# Altium PCB AdcetAlSys.PcbDoc
Units mm, origin at the board's own origin, x right, y up, seen from the top; angles counter-clockwise.
Board outline 104.5 x 67 mm, 2 copper layers (Top Layer, Bottom Layer); 36 components, 38 nets, 160 pads, 15 vias.
Unrouted connection lines stored in the file: 4.
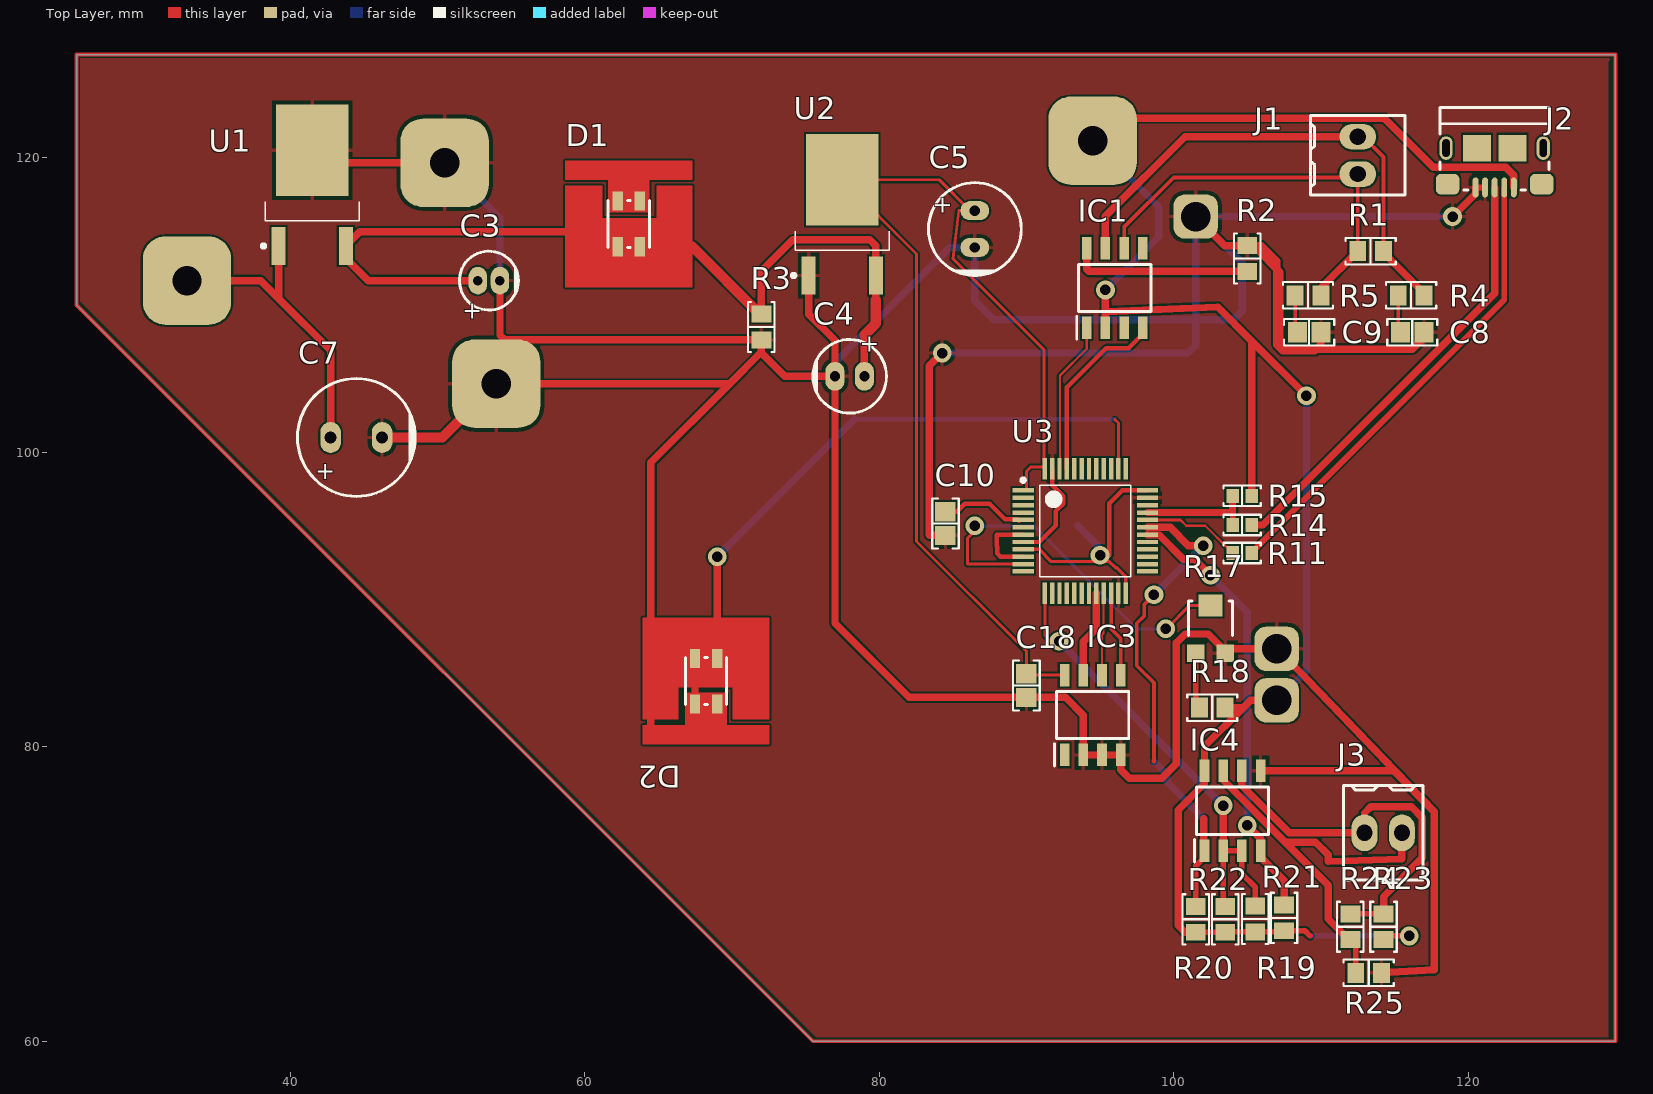
[diagram p0: Top Layer view]
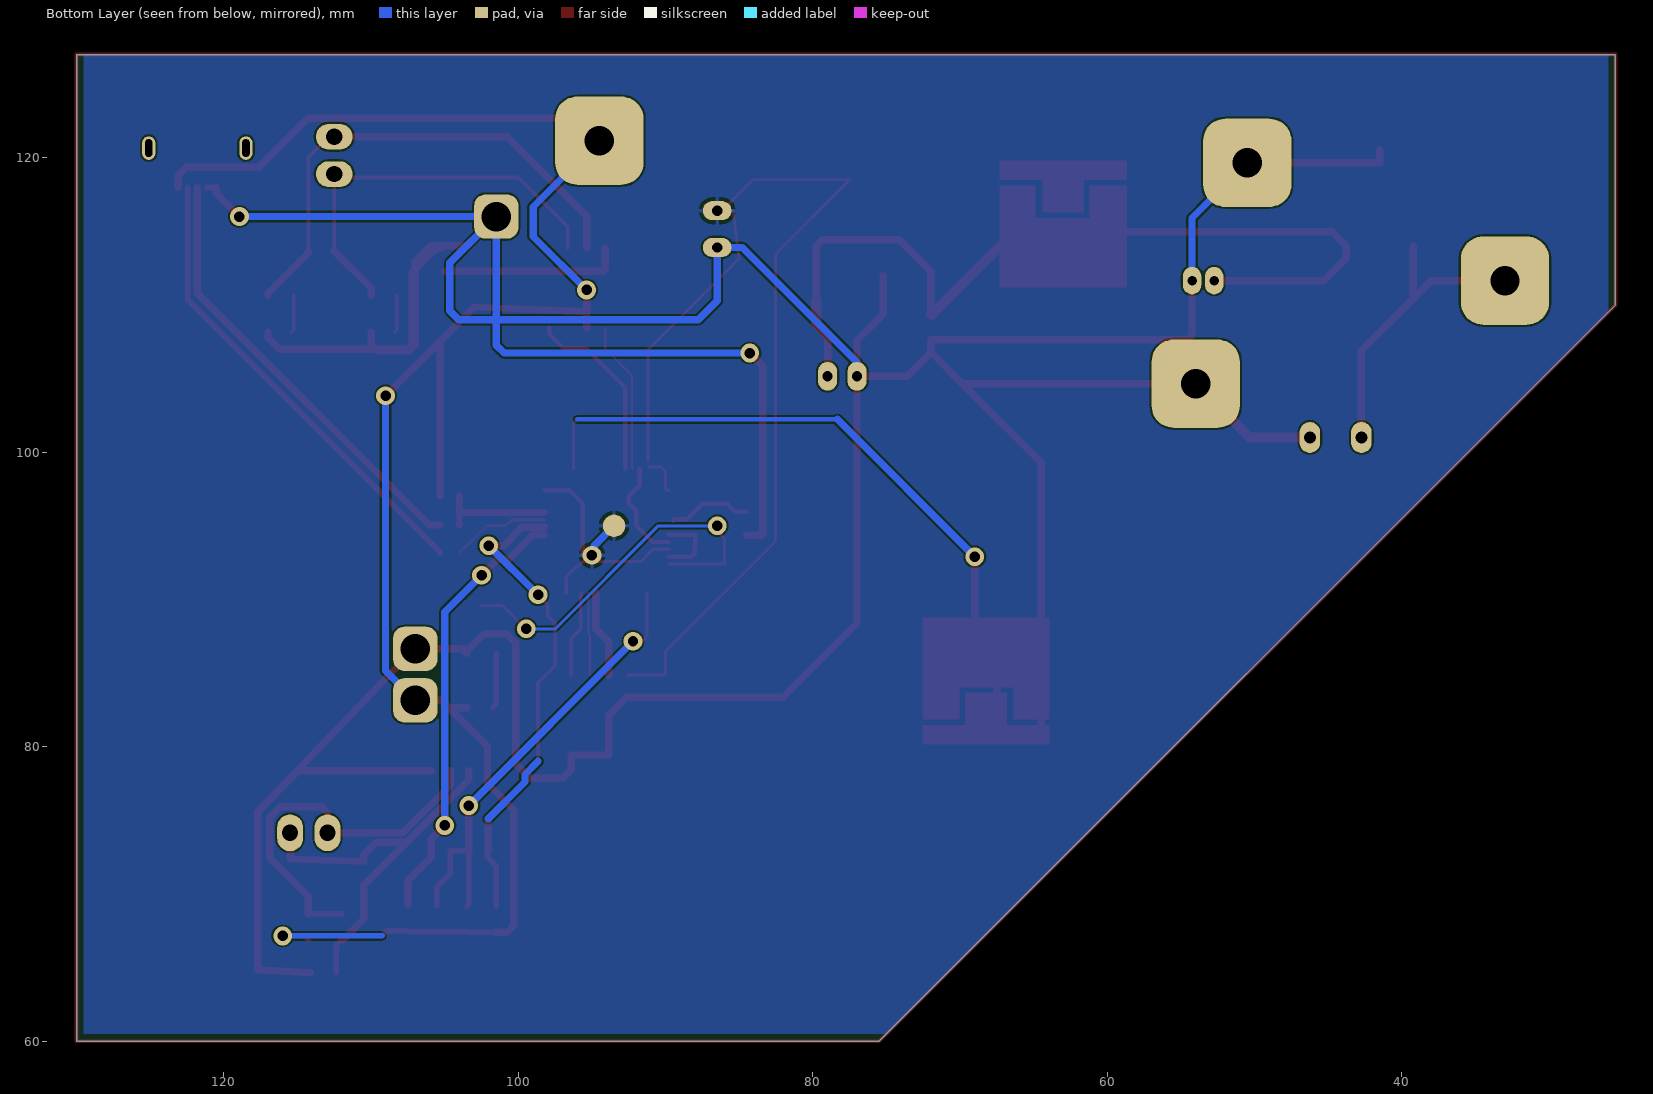
[diagram p1: Bottom Layer view, seen from below]
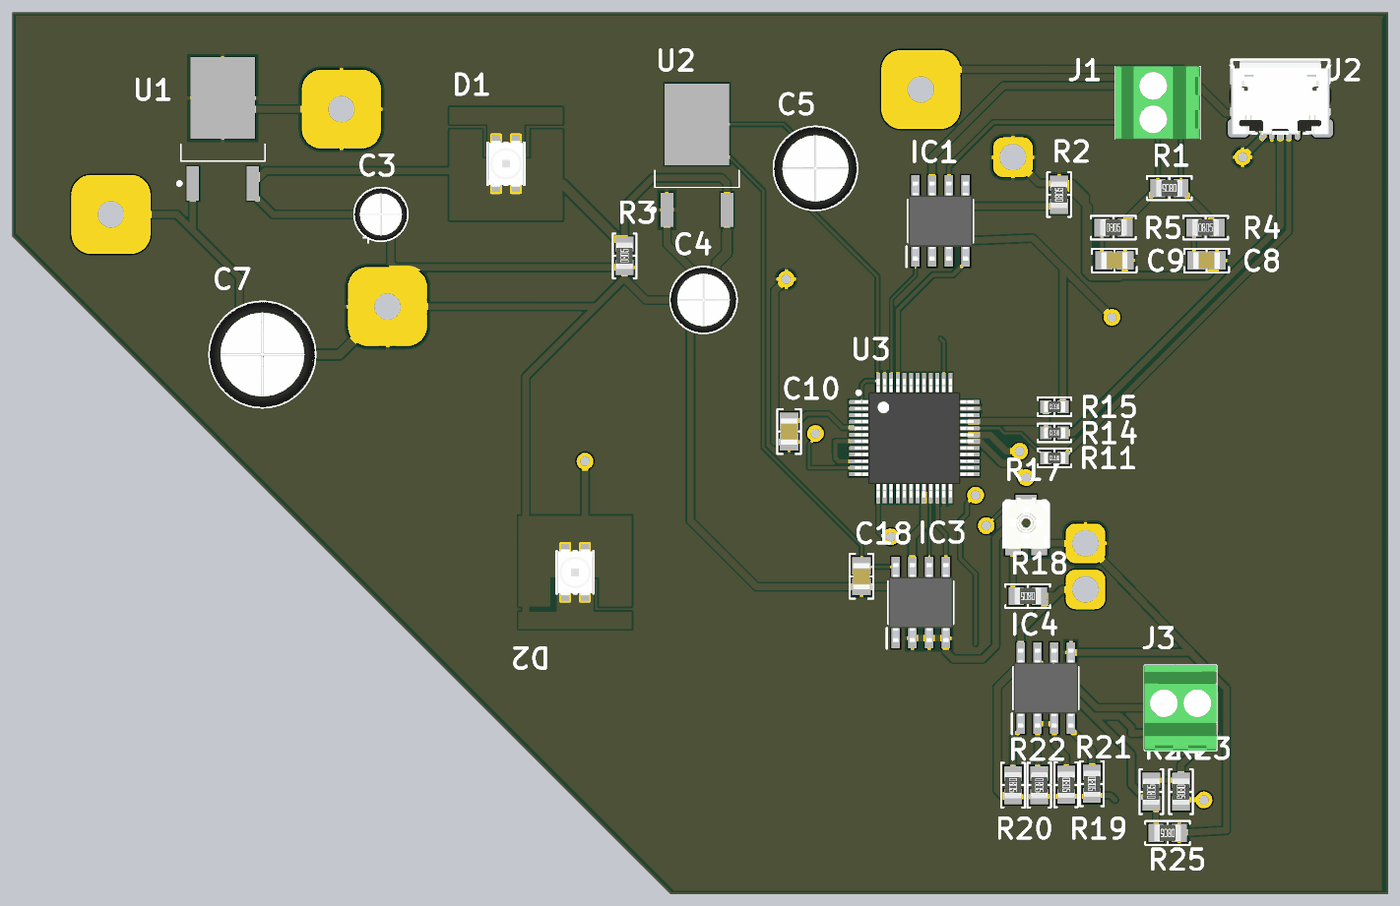
[diagram p2: 3D render of the assembled board from above, using the file's embedded part models]

## Layer stack, top to bottom
Top Solder: solder mask 0.0102, Solder Resist, Dk 3.5
Top Layer: signal copper 0.0356
Dielectric 1: dielectric 0.32, FR-4, Dk 4.8
Bottom Layer: signal copper 0.0356
Bottom Solder: solder mask 0.0102, Solder Resist, Dk 3.5

## Board outline
25.5,110 25.5,127 130,127 130,60 75.5,60

## Design rules (kind name [scope] priority, off if disabled: settings)
Clearance Clearance_1 [All] p1: gap=0.125 ignorepadtopadclearanceinfootprint=FALSE except(0: Arc-Hole Track-Hole SMDPad-Hole THPad-Hole Via-Hole Fill-Hole Poly-Hole Region-Hole Text-Hole)
Clearance [All] p2: gap=0.152 ignorepadtopadclearanceinfootprint=FALSE
HoleSize [All] p1: absolutevalues=TRUE maxlimit=5 minlimit=0.025 maxpercent=80.000 minpercent=20.000
PolygonConnect [All] p1: connectstyle=Relief reliefconductorwidth=0.254 reliefentries=4 polygonreliefangle="90 Angle" airgapwidth=0.254
RoutingVias [All] p1: holewidth=0.711 width=1.27 viastyle="Through Hole" minholewidth=0.711 minwidth=1.27 maxholewidth=0.711 maxwidth=1.27
SolderMaskExpansion [All] p1: expansion=0.102
Width [All] p1: maxlimit=2 minlimit=0.152 preferedwidth=0.5
29 further rules are at their usual default settings.

## Components (designator, comment, footprint, x,y, rotation, side; value= is the part's Value field where it differs from the comment)
C3 "1µF" "CAP TH ALUM ELEC D4.00mm S1.50mm H8.00mm" 53.5,111.65 r180 top
C4 "10µF" "CAP TH ALUM ELEC D5.00mm S2.00mm H11.00mm" 78,105.15 r0 top
C5 "100µF" "CAP TH ALUM ELEC D6.30mm S2.50mm H11.20mm" 86.5,115.15 r90 top
C7 "220µF" "CAP TH ALUM ELEC D8.00mm S3.50mm H12.50mm" 44.5,101 r180 top
C8 "560pF" "CAP 0805_2012" 116.2,108.15 r180 top
C9 "560pF" "CAP 0805_2012" 109.2,108.15 r180 top
C10 "0.1µF" "CAP 0805_2012" 84.5,95.15 r90 top
C18 "0.1µF" "CAP 0805_2012" 90,84.15 r270 top
D1 "ASMT-QRBD-AEF0E" "Broadcom 4-PLLC 3228" 63,115.5 r0 top
D2 "ASMT-QRBD-AEF0E" "Broadcom 4-PLLC 3228" 68.25,84.45 r180 top
IC1 "MCP2551T-E_SN" SOIC127P600X175-8N 96,111.15 r90 top
IC3 "M24M01-RMN6P" SOIC127P600X175-8N 94.5,82.15 r90 top
IC4 "MAX485ESA+T" SOIC127P600X175-8N 104,75.65 r90 top
J1 "282834-2" "TE 282834-2" 112.5,120.15 r90 top
J2 "10118193-0001LF" "FCI USB 10118193-0001LF" 121.8,120.6 r0 top
J3 "282834-2" "TE 282834-2" 114.23,74.15 r0 top
R1 "120 Ohms" "RES 0805_2012" 113.375,113.65 r180 top
R2 "4.7 kOhms" "RES 0805_2012" 105,113.15 r90 top
R3 "220 Ohms" "RES 0805_2012" 72,108.5 r90 top
R4 "100 Ohms" "RES 0805_2012" 116.125,110.65 r0 top
R5 "100 Ohms" "RES 0805_2012" 109.125,110.65 r0 top
R11 "20 Ohms" "RES 0603_1608" 104.65,93.15 r180 top
R14 "20 Ohms" "RES 0603_1608" 104.65,95.054 r180 top
R15 "4.7 kOhms" "RES 0603_1608" 104.65,97.039 r180 top
R17 "10 kOhms" "POT BOURNS TRIMPOT TC33" 102.5,88.15 r0 top
R18 "5 kOhms" "RES 0805_2012" 102.625,82.65 r180 top
R19 "10 kOhms" "RES 0805_2012" 103.5,68.275 r270 top
R20 "10 kOhms" "RES 0805_2012" 101.5,68.275 r270 top
R21 "10 kOhms" "RES 0805_2012" 107.5,68.375 r270 top
R22 "10 kOhms" "RES 0805_2012" 105.54,68.302 r270 top
R23 "20 kOhms" "RES 0805_2012" 114.256,67.775 r270 top
R24 "120 Ohms" "RES 0805_2012" 112,67.775 r90 top
R25 "20 kOhms" "RES 0805_2012" 113.243,64.641 r180 top
U1 "L7805-DPAK" DPAK228P972X230-3N 41.5,118.15 r90 top
U2 "LD108633 DPAK" DPAK228P972X230-3N 77.5,116.15 r90 top
U3 "STM32F101" LQFP48-STM 94,94.65 r0 top

## Footprints (in the part's own frame and the unit in brackets; to place one, negate y for a bottom-side part, rotate by r counter-clockwise, add the part's x,y. Pads: shape width x height; smd on the part's side, far side on the other; paste and mask are expansions set on the pad)
"Broadcom 4-PLLC 3228" [mm] "SOJ, 6-Leads, Body 3.20x2.80mm, IPC Medium Density"
  rect 0.7x1.3 smd paste-0.05 mask+0.1: 1(-0.75,-1.55) 1(0.75,-1.55) 2(-0.75,1.55) 2(0.75,1.55)
  Top Layer region: -1.4,0.8 1.4,0.8 1.4,3 4.3,3 4.3,4.3 -4.3,4.3 -4.3,3 -1.4,3
  Top Layer region: -4.3,2.6 -1.8,2.6 -1.8,0.4 1.9,0.4 1.9,2.6 4.3,2.6 4.3,-4.3 -4.3,-4.3
  silkscreen extent -1.4,-1.6 1.4,1.6, body extent -1.4,-1.8 1.4,1.8, height 2.1
"CAP 0805_2012" [mm] "Chip Capacitor, 2-Leads, Body 2.00x1.20mm, IPC Medium Density"
  rect 1.3x1.4 smd: 1(-0.8,0) 2(0.8,0)
  silkscreen extent -1.7,-0.9 1.7,0.9, body extent -1,-0.64 1,0.64, height 1.26
"CAP TH ALUM ELEC D4.00mm S1.50mm H8.00mm" [mm] "4mm Diameter 1.5mm Lead Spacing Aluminum Electrolytic Capacitors Radial, Can"
  oval 1.25x1.875 hole 0.65: 1(0.75,0) 2(-0.75,0)
  silkscreen extent -2,-2 2,2, body extent -2.01,-2 2,2, height 8
"CAP TH ALUM ELEC D5.00mm S2.00mm H11.00mm" [mm] "5mm Diameter 2mm Lead Spacing Aluminum Electrolytic Capacitors Radial, Can"
  oval 1.3x1.95 hole 0.7: 1(1,0) 2(-1,0)
  silkscreen extent -2.5,-2.5 2.5,2.5, body extent -2.51,-2.5 2.5,2.5, height 11
"CAP TH ALUM ELEC D6.30mm S2.50mm H11.20mm" [mm] "6.3mm Diameter 2.5mm Lead Spacing Aluminum Electrolytic Capacitors Radial, Can"
  oval 1.3x1.95 hole 0.7: 1(1.25,0) 2(-1.25,0)
  silkscreen extent -3.15,-3.15 3.15,3.15, body extent -3.16,-3.15 3.15,3.15, height 11.2
"CAP TH ALUM ELEC D8.00mm S3.50mm H12.50mm" [mm] "8mm Diameter 3.5mm Lead Spacing Aluminum Electrolytic Capacitors Radial, Can"
  oval 1.4x2.1 hole 0.8: 1(1.75,0) 2(-1.75,0)
  silkscreen extent -4,-4 4,4, body extent -4.01,-4 4,4, height 12.5
DPAK228P972X230-3N [mm] "D-PAK, 3-Pads, Body 6,40x6,56mm (max), IPC Medium Density"
  rect 2.6x0.95 smd mask+0.05: 1(-4.15,2.28) 2(-4.15,-2.28)
  rect 6.2x4.9 smd mask+0.05: 3(2.35,0)
  silkscreen extent -4.27,-3.2 -1.15,3.43, body extent -2.5,-3.2 4.1,3.2, height 2.3
"FCI USB 10118193-0001LF" [mm] "USB 2.0 Type B Micro"
  oval 0.4x1.35 smd: 1(1.3,-2.625) 2(0.65,-2.625) 3(0,-2.625) 4(-0.65,-2.625) 5(-1.3,-2.625)
  oval 0.9x1.6 hole 0.5 slot 1.2 at 90 deg: S(-3.3,0.05) S(3.3,0.05)
  rrect50% 1.6x1.4 smd: S(-3.2,-2.4) S(3.2,-2.4)
  rect 1.9x1.8 smd: S(-1.2,0.05) S(1.2,0.05)
  silkscreen extent -3.7,-2.8 3.7,2.8, body extent -3.93,-2.9 3.93,2.76, height 2.78
LQFP48-STM [mm] "TSQFP, 48-Leads, Body 7,00x7,00mm, Pitch 0,50mm, IPC Medium Density"
  rect 1.45x0.3 smd mask+0.05: 1(-4.225,2.75) 2(-4.225,2.25) 3(-4.225,1.75) 4(-4.225,1.25) 5(-4.225,0.75) 6(-4.225,0.25) 7(-4.225,-0.25) 8(-4.225,-0.75) 9(-4.225,-1.25) 10(-4.225,-1.75) 11(-4.225,-2.25) 12(-4.225,-2.75) 25(4.225,-2.75) 26(4.225,-2.25) 27(4.225,-1.75) 28(4.225,-1.25) 29(4.225,-0.75) 30(4.225,-0.25) 31(4.225,0.25) 32(4.225,0.75) 33(4.225,1.25) 34(4.225,1.75) 35(4.225,2.25) 36(4.225,2.75)
  rect 0.3x1.45 smd mask+0.05: 13(-2.75,-4.225) 14(-2.25,-4.225) 15(-1.75,-4.225) 16(-1.25,-4.225) 17(-0.75,-4.225) 18(-0.25,-4.225) 19(0.25,-4.225) 20(0.75,-4.225) 21(1.25,-4.225) 22(1.75,-4.225) 23(2.25,-4.225) 24(2.75,-4.225) 37(2.75,4.225) 38(2.25,4.225) 39(1.75,4.225) 40(1.25,4.225) 41(0.75,4.225) 42(0.25,4.225) 43(-0.25,4.225) 44(-0.75,4.225) 45(-1.25,4.225) 46(-1.75,4.225) 47(-2.25,4.225) 48(-2.75,4.225)
  silkscreen extent -4.35,-3.1 3.1,3.57, body extent -4.5,-4.5 4.5,4.5, height 1.6
"POT BOURNS TRIMPOT TC33" [mm] "Bourns Trimpot TC33X-1 - Open Frame 3mm x 3.8mm x 1.2mm"
  rect 1.2x1.2 smd: 1(-1,-1.8) 3(1,-1.8)
  rect 1.6x1.5 smd: 2(0,1.45)
  silkscreen extent -1.5,-0.6 1.5,1.75, body extent -1.8,-1.91 1.8,1.95, height 1.15
"RES 0603_1608" [mm] "Chip Resistor, 2-Leads, Body 1.60x0.80mm, IPC Medium Density"
  rect 0.85x0.95 smd: 1(-0.65,0) 2(0.65,0)
  silkscreen extent -1.27,-0.7 1.27,0.7, body extent -0.8,-0.4 0.8,0.4, height 0.45
"RES 0805_2012" [mm] "Chip Resistor, 2-Leads, Body 2.00x1.25mm, IPC Medium Density"
  rect 1.15x1.35 smd: 1(-0.875,0) 2(0.875,0)
  silkscreen extent -1.7,-0.9 1.7,0.9, body extent -1,-0.62 1,0.63, height 0.6
SOIC127P600X175-8N [mm]
  rect 1.525x0.65 smd: 1(-2.712,1.905) 2(-2.712,0.635) 3(-2.712,-0.635) 4(-2.712,-1.905) 5(2.712,-1.905) 6(2.712,-0.635) 7(2.712,0.635) 8(2.712,1.905)
  silkscreen extent -3.48,-2.45 1.6,2.58, body extent -3,-2.45 3,2.45, height 1.75
"TE 282834-2" [mm]
  oval 1.75x2.5 hole 1.1: 1(-1.27,0) 2(1.27,0)
  silkscreen extent -2.7,-3.2 2.7,3.2, body extent -2.77,-3.25 2.77,3.25, height 10

## Part data
C3: library part USR1H010MDD, "CAP ALUM 1UF 20% 50V RADIAL", Device Package="Radial, Can", Lifetime @ Temp.="2000 Hrs @ 85°C", Manufacturer=Nichicon, Operating Temperature="-40°C ~ 85°C", Ripple Current @ High Frequency="15mA @ 10kHz", Ripple Current @ Low Frequency="10mA @ 120Hz", Supplier Part Number 1=493-6031-ND, Tolerance=±20%, Voltage - Rated=50V, Applications="General Purpose", Capacitance=1µF, ComponentLink1Description=Datasheet, ComponentLink1URL=http://nichicon-us.com/english/products/pdfs/e-usa_usr.pdf, ComponentLink2Description="DigiKey Link", ComponentLink2URL=http://digikey.com/product-detail/en/nichicon/USR1H010MDD/493-6031-ND/2539217, Height - Seated (Max)="0.315\" (8.00mm)", LastUpdated="6.09.2020 01:48:38", Lead Spacing="0.059\" (1.50mm)", Lifecycle Status=Active, Minimum Order=1, Mounting Type="Through Hole", Package / Case="Radial, Can", Packaging=Bulk, Part Number=USR1H010MDD, Part Status=Active, PartId=23369, Polarization=Polar, Price=0.23, Series=USR, Size / Dimension="0.157\" Dia (4.00mm)", Supplier 1=DigiKey
C4: library part RFS-16V100ME3#5, "CAP ALUM 10UF 20% 16V RADIAL", Device Package="Radial, Can", Lifetime @ Temp.="1000 Hrs @ 85°C", Manufacturer="Elna America", Operating Temperature="-40°C ~ 85°C", Ripple Current @ Low Frequency="35mA @ 120Hz", Supplier Part Number 1=604-1109-ND, Tolerance=±20%, Voltage - Rated=16V, Applications=Audio, Capacitance=10µF, ComponentLink1Description=Datasheet, ComponentLink1URL=http://www.elna.co.jp/en/capacitor/alumi/catalog/pdf/rfs_e.pdf, ComponentLink2Description="DigiKey Link", ComponentLink2URL=http://digikey.com/product-detail/en/elna-america/RFS-16V100ME3-5/604-1109-ND/2171160, Height - Seated (Max)="0.433\" (11.00mm)", LastUpdated="4.09.2020 23:28:56", Lead Spacing="0.079\" (2.00mm)", Lifecycle Status=Active, Minimum Order=1, Mounting Type="Through Hole", Package / Case="Radial, Can", Packaging=Bulk, Part Number=RFS-16V100ME3#5, Part Status=Active, PartId=21468, Polarization=Polar, Price=0.30, Series="RFS, SILMIC II", Size / Dimension="0.197\" Dia (5.00mm)", Supplier 1=DigiKey
C5: library part ECE-A0JN101U, "CAP ALUM 100UF 20% 6.3V RADIAL", Device Package="Radial, Can", Lifetime @ Temp.="2000 Hrs @ 85°C", Manufacturer="Panasonic Electronic Components", Operating Temperature="-40°C ~ 85°C", Ripple Current @ High Frequency="221mA @ 10kHz", Supplier Part Number 1=P1143-ND, Tolerance=±20%, Voltage - Rated=6.3V, Applications="General Purpose", Capacitance=100µF, ComponentLink2Description="DigiKey Link", ComponentLink2URL=http://digikey.com/product-detail/en/panasonic-electronic-components/ECE-A0JN101U/P1143-ND/227584, Height - Seated (Max)="0.441\" (11.20mm)", LastUpdated="4.09.2020 01:05:43", Lead Spacing="0.098\" (2.50mm)", Lifecycle Status=Active, Minimum Order=1, Mounting Type="Through Hole", Package / Case="Radial, Can", Packaging=Bulk, Part Number=ECE-A0JN101U, Part Status=Active, PartId=19981, Polarization=Bi-Polar, Price=0.45, Series=SU, Size / Dimension="0.248\" Dia (6.30mm)", Supplier 1=DigiKey
C7: library part ECA-1VM221BJ, "CAP ALUM 220UF 20% 35V RADIAL", Device Package="Radial, Can", Lifetime @ Temp.="2000 Hrs @ 85°C", Manufacturer="Panasonic Electronic Components", Operating Temperature="-40°C ~ 85°C", Ripple Current @ High Frequency="595mA @ 10kHz", Ripple Current @ Low Frequency="350mA @ 120Hz", Supplier Part Number 1=P10419TB-ND, Tolerance=±20%, Voltage - Rated=35V, Applications="General Purpose", Capacitance=220µF, ComponentLink1Description=Datasheet, ComponentLink1URL=//media.digikey.com/pdf/Data%20Sheets/Panasonic%20Electronic%20Components/ECA-xxM%20Series,TypeA.pdf, ComponentLink2Description="DigiKey Link", ComponentLink2URL=http://digikey.com/product-detail/en/panasonic-electronic-components/ECA-1VM221BJ/P10419TB-ND/268504, Height - Seated (Max)="0.492\" (12.50mm)", LastUpdated="7.09.2020 05:24:51", Lead Spacing="0.138\" (3.50mm)", Lifecycle Status=Active, Minimum Order=1000, Mounting Type="Through Hole", Package / Case="Radial, Can", Packaging=TapeAndBox, Part Number=ECA-1VM221BJ, Part Status=Active, PartId=7241, Polarization=Polar, Price=0.08, Series=M, Size / Dimension="0.315\" Dia (8.00mm)", Supplier 1=DigiKey
C8 C9: library part 08055A561FAT2A, "CAP CER 560PF 50V C0G/NP0 0805", Device Package="0805 (2012 Metric)", Manufacturer="AVX Corporation", Operating Temperature="-55°C ~ 125°C", Supplier Part Number 1=478-6047-1-ND, Temperature Coefficient="C0G, NP0", Tolerance=±1%, Voltage - Rated=50V, Applications="General Purpose", Capacitance=560pF, ComponentLink1Description=Datasheet, ComponentLink1URL=http://datasheets.avx.com/C0GNP0-Dielectric.pdf, ComponentLink2Description="DigiKey Link", ComponentLink2URL=http://digikey.com/product-detail/en/avx-corporation/08055A561FAT2A/478-6047-1-ND/2208961, LastUpdated="2.09.2020 01:04:40", Lifecycle Status=Active, Minimum Order=1, Mounting Type="Surface Mount, MLCC", Package / Case="0805 (2012 Metric)", Packaging=TapeAndReel, Part Number=08055A561FAT2A, Part Status=Active, PartId=3349, Price=0.15, Series=-, Size / Dimension="0.079\" L x 0.049\" W (2.01mm x 1.25mm)", Supplier 1=DigiKey, Thickness (Max)="0.037\" (0.94mm)"
C10 C18: library part 0805Y0250104KXT, "CAP CER 0.1UF 25V X7R 0805", Device Package="0805 (2012 Metric)", Manufacturer="Knowles Syfer", Operating Temperature="-55°C ~ 125°C", Supplier Part Number 1=1608-1010-1-ND, Temperature Coefficient=X7R, Tolerance=±10%, Voltage - Rated=25V, Applications="Boardflex Sensitive", Capacitance=0.1µF, ComponentLink1Description=Datasheet, ComponentLink1URL=https://www.knowlescapacitors.com/getattachment/2dbfc8bc-e2b3-4b4d-afb1-43b011b9ebe0/High-Std-Voltage.aspx, ComponentLink2Description="DigiKey Link", ComponentLink2URL=http://digikey.com/product-detail/en/knowles-syfer/0805Y0250104KXT/1608-1010-1-ND/5730209, Features="Soft Termination", LastUpdated="2.09.2020 01:04:40", Lifecycle Status=Active, Minimum Order=1, Mounting Type="Surface Mount, MLCC", Package / Case="0805 (2012 Metric)", Packaging=TapeAndReel, Part Number=0805Y0250104KXT, Part Status=Active, PartId=3471, Price=0.16, Series=FlexiCap™, Size / Dimension="0.079\" L x 0.049\" W (2.00mm x 1.25mm)", Supplier 1=DigiKey, Thickness (Max)="0.051\" (1.30mm)"
D1 D2: "LED INDICATOR 0.5W RED 4PLCC", Color=Red, Current - Max=300mA, Current - Test=150mA, Device Package=4-PLCC, Flux @ Current/Temperature - Test="16lm (12lm ~ 20lm)", Lumens/Watt @ Current - Test="43 lm/W", Manufacturer="Broadcom Limited", Supplier Part Number 1=516-2679-1-ND, Temperature - Test=25°C, Voltage - Forward (Vf) (Typ)=2.5V, ComponentLink1Description=Datasheet, ComponentLink1URL=https://docs.broadcom.com/docs/AV02-1841EN, ComponentLink2Description="DigiKey Link", ComponentLink2URL=http://digikey.com/product-detail/en/broadcom-limited/ASMT-QRBD-AEF0E/516-2679-1-ND/3909187, Height - Seated (Max)="0.083\" (2.10mm)", LastUpdated="24.04.2020 00:57:49", Lifecycle Status=Active, Minimum Order=1, Mounting Type="Surface Mount", Package / Case=4-PLCC, Packaging=TapeAndReel, Part Number=ASMT-QRBD-AEF0E, Part Status=Active, Price=0.42, Size / Dimension="0.126\" L x 0.110\" W (3.20mm x 2.80mm)", Supplier 1=DigiKey, Supplier Device Package=4-PLCC, Viewing Angle=120°, Wavelength="628nm (620nm ~ 635nm)"
IC1: "Integrated Circuit", Arrow Part Number=MCP2551T-E/SN, Manufacturer_Name=Microchip, Mouser Part Number=579-MCP2551T-E/SN, Arrow Price/Stock=https://www.arrow.com/en/products/mcp2551t-esn/microchip-technology?region=nac, Datasheet Link=https://componentsearchengine.com/Datasheets/1/MCP2551T-E_SN.pdf, Height=1.75mm, Manufacturer_Part_Number=MCP2551T-E/SN, Mouser Price/Stock=https://www.mouser.co.uk/ProductDetail/Microchip-Technology/MCP2551T-E-SN?qs=gZwDaUDMhIcQtLtB%252B7bOWQ%3D%3D
IC3: "Integrated Circuit", Manufacturer_Name=STMicroelectronics, Mouser Part Number=511-M24M01-RMN6P, Arrow Part Number=M24M01-RMN6P, Arrow Price/Stock=https://www.arrow.com/en/products/m24m01-rmn6p/stmicroelectronics?region=nac, Datasheet Link=https://datasheet.datasheetarchive.com/originals/distributors/SFDatasheet-5/sf-000111818.pdf, Height=1.75mm, Manufacturer_Part_Number=M24M01-RMN6P, Mouser Price/Stock=https://www.mouser.co.uk/ProductDetail/STMicroelectronics/M24M01-RMN6P?qs=Djavi1aLnwpufYbzjHXCEA%3D%3D
IC4: "Integrated Circuit", Manufacturer_Name="Maxim Integrated", Mouser Part Number=700-MAX485ESAT, Arrow Part Number=MAX485ESA+T, Arrow Price/Stock=https://www.arrow.com/en/products/max485esat/maxim-integrated?region=nac, Datasheet Link=https://datasheets.maximintegrated.com/en/ds/MAX1487-MAX491.pdf, Height=1.75mm, Manufacturer_Part_Number=MAX485ESA+T, Mouser Price/Stock=https://www.mouser.co.uk/ProductDetail/Maxim-Integrated/MAX485ESA%2bT?qs=LHmEVA8xxfYXmvxEk%252BFtEg%3D%3D
J1 J3: "TERM BLK 2P SIDE ENT 2.54MM PCB", Color=Green, Current=10A, Manufacturer="TE Connectivity AMP Connectors", Supplier Part Number 1=A98333-ND, Voltage=150V, ComponentLink1Description=Datasheet, ComponentLink1URL=https://www.te.com/commerce/DocumentDelivery/DDEController?Action=srchrtrv&DocNm=282834&DocType=Customer+Drawing&DocLang=English, ComponentLink2Description="DigiKey Link", ComponentLink2URL=http://digikey.com/product-detail/en/te-connectivity-amp-connectors/282834-2/A98333-ND/1150135, LastUpdated="15.01.2020 04:15:38", Lifecycle Status=Active, Mating Orientation="Horizontal with Board", Minimum Order=1, Mounting Type="Through Hole", Number of Levels=1, Packaging=Bulk, Part Number=282834-2, Part Status=Active, Pitch="0.100\" (2.54mm)", Positions Per Level=2, Price=0.88, Series=Buchanan, Supplier 1=DigiKey, Wire Gauge="16-30 AWG", Wire Termination="Screw - Rising Cage Clamp"
J2: "CONN RCPT USB2.0 MICRO B SMD R/A", Current Rating (Amps)="1.8A per Contact", Manufacturer="Amphenol ICC (FCI)", Operating Temperature="-30°C ~ 80°C", Supplier Part Number 1=609-4616-2-ND, Voltage - Rated=100VAC, ComponentLink1Description=Datasheet, ComponentLink1URL=https://cdn.amphenol-icc.com/media/wysiwyg/files/documentation/datasheet/inputoutput/io_usb_micro.pdf, ComponentLink2Description="DigiKey Link", ComponentLink2URL=//digikey.com/product-detail/en/amphenol-icc-fci/10118193-0001LF/609-4616-2-ND/2785388, Connector Type="USB - micro B", Features="Solder Retention", Gender=Receptacle, LastUpdated="9.12.2019 20:51:28", Lifecycle Status=0, Mating Cycles=10000, Minimum Order=1, Mounting Feature=Horizontal, Mounting Type="Surface Mount, Right Angle; Through Hole", Number of Contacts=5, Number of Ports=1, Packaging=TapeAndReel, Part Number=10118193-0001LF, Part Status=Active, Price=0.21, Series=-, Shielding=Shielded, Specifications="USB 2.0", Supplier 1=DigiKey, Termination=Solder
R1 R24: library part CRGP0805F120R, "CRGP 0805 120R 1%", Device Package="0805 (2012 Metric)", Manufacturer="TE Connectivity Passive Product", Operating Temperature="-55°C ~ 155°C", Power (Watts)="0.333W, 1/3W", Supplier Device Package=0805, Supplier Part Number 1=A130466CT-ND, Temperature Coefficient=±100ppm/°C, Tolerance=±1%, ComponentLink1Description=Datasheet, ComponentLink1URL=https://www.te.com/commerce/DocumentDelivery/DDEController?Action=srchrtrv&DocNm=9-1773463-9&DocType=DS&DocLang=English, ComponentLink2Description="DigiKey Link", ComponentLink2URL=http://digikey.com/product-detail/en/te-connectivity-passive-product/CRGP0805F120R/A130466CT-ND/8578298, Composition="Thick Film", Features="Pulse Withstanding", Height - Seated (Max)="0.026\" (0.65mm)", LastUpdated="2.09.2020 01:14:53", Lifecycle Status=Active, Minimum Order=1, Number of Terminations=2, Package / Case="0805 (2012 Metric)", Packaging=TapeAndReel, Part Number=CRGP0805F120R, Part Status=Active, PartId=41696, Price=0.02, Resistance="120 Ohms", Series=CRGP, Size / Dimension="0.079\" L x 0.049\" W (2.00mm x 1.25mm)", Supplier 1=DigiKey
R2: library part RR1220P-472-D, "RES SMD 4.7K OHM 0.5% 1/10W 0805", Device Package="0805 (2012 Metric)", Manufacturer=Susumu, Operating Temperature="-55°C ~ 125°C", Power (Watts)="0.1W, 1/10W", Supplier Part Number 1=RR12P4.7KDCT-ND, Temperature Coefficient=±25ppm/°C, Tolerance=±0.5%, ComponentLink1Description=Datasheet, ComponentLink1URL=http://www.susumu.co.jp/common/pdf/n_catalog_partition05_en.pdf, ComponentLink2Description="DigiKey Link", ComponentLink2URL=http://digikey.com/product-detail/en/susumu/RR1220P-472-D/RR12P4.7KDCT-ND/432846, Composition="Thin Film", Height - Seated (Max)="0.020\" (0.50mm)", LastUpdated="2.09.2020 01:14:59", Lifecycle Status=Active, Minimum Order=1, Number of Terminations=2, Package / Case="0805 (2012 Metric)", Packaging=TapeAndReel, Part Number=RR1220P-472-D, Part Status=Active, PartId=39098, Price=0.01, Resistance="4.7 kOhms", Series=RR, Size / Dimension="0.079\" L x 0.049\" W (2.00mm x 1.25mm)", Supplier 1=DigiKey
R3: library part ERJ-6ENF2200V, "RES SMD 220 OHM 1% 1/8W 0805", Device Package="0805 (2012 Metric)", Manufacturer="Panasonic Electronic Components", Operating Temperature="-55°C ~ 155°C", Power (Watts)="0.125W, 1/8W", Ratings=AEC-Q200, Supplier Device Package=0805, Supplier Part Number 1=P220CCT-ND, Temperature Coefficient=±100ppm/°C, Tolerance=±1%, ComponentLink1Description=Datasheet, ComponentLink1URL=https://industrial.panasonic.com/cdbs/www-data/pdf/RDA0000/AOA0000C304.pdf, ComponentLink2Description="DigiKey Link", ComponentLink2URL=http://digikey.com/product-detail/en/panasonic-electronic-components/ERJ-6ENF2200V/P220CCT-ND/1746831, Composition="Thick Film", Features="Automotive AEC-Q200", Height - Seated (Max)="0.028\" (0.70mm)", LastUpdated="2.09.2020 01:15:19", Lifecycle Status=Active, Minimum Order=1, Number of Terminations=2, Package / Case="0805 (2012 Metric)", Packaging=TapeAndReel, Part Number=ERJ-6ENF2200V, Part Status=Active, PartId=30101, Price=0.01, Resistance="220 Ohms", Series=ERJ, Size / Dimension="0.079\" L x 0.049\" W (2.00mm x 1.25mm)", Supplier 1=DigiKey
R4 R5: library part RR1220P-101-D, "RES SMD 100 OHM 0.5% 1/10W 0805", Device Package="0805 (2012 Metric)", Manufacturer=Susumu, Operating Temperature="-55°C ~ 125°C", Power (Watts)="0.1W, 1/10W", Supplier Part Number 1=RR12P100DCT-ND, Temperature Coefficient=±25ppm/°C, Tolerance=±0.5%, ComponentLink1Description=Datasheet, ComponentLink1URL=http://www.susumu.co.jp/common/pdf/n_catalog_partition05_en.pdf, ComponentLink2Description="DigiKey Link", ComponentLink2URL=http://digikey.com/product-detail/en/susumu/RR1220P-101-D/RR12P100DCT-ND/432806, Composition="Thin Film", Height - Seated (Max)="0.020\" (0.50mm)", LastUpdated="2.09.2020 01:14:59", Lifecycle Status=Active, Minimum Order=1, Number of Terminations=2, Package / Case="0805 (2012 Metric)", Packaging=TapeAndReel, Part Number=RR1220P-101-D, Part Status=Active, PartId=39083, Price=0.01, Resistance="100 Ohms", Series=RR, Size / Dimension="0.079\" L x 0.049\" W (2.00mm x 1.25mm)", Supplier 1=DigiKey
R11 R14: library part ERJ-PA3J200V, "RES SMD 20 OHM 5% 1/4W 0603", Device Package="0603 (1608 Metric)", Manufacturer="Panasonic Electronic Components", Operating Temperature="-55°C ~ 155°C", Power (Watts)="0.25W, 1/4W", Ratings=AEC-Q200, Supplier Device Package=0603, Supplier Part Number 1=P20.00BZCT-ND, Temperature Coefficient=±200ppm/°C, Tolerance=±5%, ComponentLink1Description=Datasheet, ComponentLink1URL=https://industrial.panasonic.com/cdbs/www-data/pdf/RDO0000/AOA0000C331.pdf, ComponentLink2Description="DigiKey Link", ComponentLink2URL=http://digikey.com/product-detail/en/panasonic-electronic-components/ERJ-PA3J200V/P20.00BZCT-ND/5036277, Composition="Thick Film", Features="Automotive AEC-Q200, Pulse Withstanding", Height - Seated (Max)="0.022\" (0.55mm)", LastUpdated="2.09.2020 01:09:51", Lifecycle Status=Active, Minimum Order=1, Number of Terminations=2, Package / Case="0603 (1608 Metric)", Packaging=TapeAndReel, Part Number=ERJ-PA3J200V, Part Status=Active, PartId=20433, Price=0.01, Resistance="20 Ohms", Series=ERJ, Size / Dimension="0.063\" L x 0.031\" W (1.60mm x 0.80mm)", Supplier 1=DigiKey
R15: library part CRG0603F4K7, "RES SMD 4.7K OHM 1% 1/10W 0603", Device Package="0603 (1608 Metric)", Manufacturer="TE Connectivity Passive Product", Operating Temperature="-55°C ~ 155°C", Power (Watts)="0.1W, 1/10W", Supplier Device Package=0603, Supplier Part Number 1=A106050CT-ND, Temperature Coefficient=±100ppm/°C, Tolerance=±1%, ComponentLink1Description=Datasheet, ComponentLink1URL=https://www.te.com/commerce/DocumentDelivery/DDEController?Action=srchrtrv&DocNm=1773204&DocType=DS&DocLang=English, ComponentLink2Description="DigiKey Link", ComponentLink2URL=http://digikey.com/product-detail/en/te-connectivity-passive-product/CRG0603F4K7/A106050CT-ND/3477690, Composition="Thick Film", Height - Seated (Max)="0.022\" (0.55mm)", LastUpdated="2.09.2020 01:09:39", Lifecycle Status=Active, Minimum Order=1, Number of Terminations=2, Package / Case="0603 (1608 Metric)", Packaging=CutTape, Part Number=CRG0603F4K7, Part Status=Active, PartId=24011, Price=0.10, Resistance="4.7 kOhms", Series="CRG, Neohm", Size / Dimension="0.063\" L x 0.031\" W (1.60mm x 0.80mm)", Supplier 1=DigiKey
R17: library part TC33X-2-103G, "TRIMMER 10K OHM 0.1W J LEAD TOP", Manufacturer="Bourns Inc.", Power (Watts)="0.1W, 1/10W", Resistive Material=Cermet, Supplier Part Number 1=TC33X-2-103G-ND, Temperature Coefficient=±250ppm/°C, Tolerance=±25%, Adjustment Type="Top Adjustment", ComponentLink1Description=Datasheet, ComponentLink1URL=https://www.bourns.com/docs/Product-Datasheets/TC33.pdf, ComponentLink2Description="DigiKey Link", ComponentLink2URL=http://digikey.com/product-detail/en/bourns-inc/TC33X-2-103G/TC33X-2-103G-ND/2566880, LastUpdated="30.08.2020 21:01:57", Lifecycle Status=Active, Minimum Order=9000, Mounting Type="Surface Mount", Number of Turns=1, Packaging=TapeAndReel, Part Number=TC33X-2-103G, PartId=68, Price=0.13, Resistance="10 kOhms", Series="Trimpot® TC33 - Open Frame", Size / Dimension="Rectangular - 0.150\" x 0.142\" Face x 0.047\" H (3.80mm x 3.60mm x 1.20mm)", Supplier 1=DigiKey, Termination Style="J Lead"
R18: library part CRCW08055K00FKTA, "RES SMD 5K OHM 1% 1/8W 0805", Device Package="0805 (2012 Metric)", Manufacturer="Vishay Dale", Operating Temperature="-55°C ~ 155°C", Power (Watts)="0.125W, 1/8W", Ratings=AEC-Q200, Supplier Device Package=0805, Supplier Part Number 1=541-4321-1-ND, Temperature Coefficient=±100ppm/°C, Tolerance=±1%, ComponentLink1Description=Datasheet, ComponentLink1URL=http://www.vishay.com/docs/20008/dcrcw.pdf, ComponentLink2Description="DigiKey Link", ComponentLink2URL=http://digikey.com/product-detail/en/vishay-dale/CRCW08055K00FKTA/541-4321-1-ND/8565934, Composition="Thick Film", Features="Automotive AEC-Q200", Height - Seated (Max)="0.020\" (0.50mm)", LastUpdated="2.09.2020 01:14:31", Lifecycle Status=Active, Minimum Order=1, Number of Terminations=2, Package / Case="0805 (2012 Metric)", Packaging=TapeAndReel, Part Number=CRCW08055K00FKTA, Part Status=Active, PartId=48587, Price=0.02, Resistance="5 kOhms", Series=CRCW, Size / Dimension="0.079\" L x 0.049\" W (2.00mm x 1.25mm)", Supplier 1=DigiKey
R19 R20 R21 R22: library part CRCW080510K0FKEA, "RES SMD 10K OHM 1% 1/8W 0805", Device Package="0805 (2012 Metric)", Manufacturer="Vishay Dale", Operating Temperature="-55°C ~ 155°C", Power (Watts)="0.125W, 1/8W", Ratings=AEC-Q200, Supplier Device Package=0805, Supplier Part Number 1=541-10.0KCCT-ND, Temperature Coefficient=±100ppm/°C, Tolerance=±1%, ComponentLink1Description=Datasheet, ComponentLink1URL=http://www.vishay.com/docs/20035/dcrcwe3.pdf, ComponentLink2Description="DigiKey Link", ComponentLink2URL=http://digikey.com/product-detail/en/vishay-dale/CRCW080510K0FKEA/541-10.0KCCT-ND/1180897, Composition="Thick Film", Features="Automotive AEC-Q200", Height - Seated (Max)="0.020\" (0.50mm)", LastUpdated="2.09.2020 01:15:23", Lifecycle Status=Active, Minimum Order=1, Number of Terminations=2, Package / Case="0805 (2012 Metric)", Packaging=TapeAndReel, Part Number=CRCW080510K0FKEA, Part Status=Active, PartId=28101, Price=0.01, Resistance="10 kOhms", Series=CRCW, Size / Dimension="0.079\" L x 0.049\" W (2.00mm x 1.25mm)", Supplier 1=DigiKey
R23 R25: library part RR1220P-203-D, "RES SMD 20K OHM 0.5% 1/10W 0805", Device Package="0805 (2012 Metric)", Manufacturer=Susumu, Operating Temperature="-55°C ~ 125°C", Power (Watts)="0.1W, 1/10W", Supplier Part Number 1=RR12P20.0KDCT-ND, Temperature Coefficient=±25ppm/°C, Tolerance=±0.5%, ComponentLink1Description=Datasheet, ComponentLink1URL=http://www.susumu.co.jp/common/pdf/n_catalog_partition05_en.pdf, ComponentLink2Description="DigiKey Link", ComponentLink2URL=http://digikey.com/product-detail/en/susumu/RR1220P-203-D/RR12P20.0KDCT-ND/432861, Composition="Thin Film", Height - Seated (Max)="0.020\" (0.50mm)", LastUpdated="2.09.2020 01:14:59", Lifecycle Status=Active, Minimum Order=1, Number of Terminations=2, Package / Case="0805 (2012 Metric)", Packaging=TapeAndReel, Part Number=RR1220P-203-D, Part Status=Active, PartId=39126, Price=0.01, Resistance="20 kOhms", Series=RR, Size / Dimension="0.079\" L x 0.049\" W (2.00mm x 1.25mm)", Supplier 1=DigiKey
U1: "L7805 5V REGULATOR. SMD PAKET"
U2: "LD1086 3.3V REGULATOR"
U3: "STM32F101 48 PÝNLÝ MÝKROÝÞLEMCÝ"

## Free pads (board coordinates)
  round 1.524 smd far side: 2(93.5,95)
  rrect50% 6x6 hole 2: 12-24V(33,111.65) +5(94.5,121.15) GND(50.5,119.65) GND(54,104.65)
  rrect50% 3x3 hole 2: +5(107,83.15) GND(101.5,116) GND(107,86.65)

## Via types
v1: diameter 1.27, hole 0.711, Top Layer to Bottom Layer, 15 vias

## Nets (pads, with @x,y where several pads share a name; then routed paths per layer and width w, separated by ;. In a path a pad name is that pad's centre, name@x,y a point inside that pad or via, vN(x,y) a via of type N, cw(c..) or ccw(c..) an arc to the next point about the centre after c; other vN are vias at no path point)
+3.3V: C5.1 C18.1 IC3.8 pad.2 U2.3 U3.1 U3.9 U3.24 U3.36 U3.48 | length 91.6
  Top Layer w0.2: C5.1 C5.1@86.175,116.4 ; U3.1 89.8,97.425 89.925,97.425 90,97.5 90,98.707 90.293,99 U3.48@91.15,99 ; U3.48@91.21,99.41 91.21,106.944 85.023,113.131 85.407,116.4 C5.1@86.175,116.4 ; IC3.8 90.088,84.862 C18.1 90,86.479 82.542,93.937 82.542,113.458 U2.3 84.075,118.5 C5.1@86.175,116.4
  Top Layer w0.23: U3.9 90.875,93.4 91.702,92.573 95.636,92.573 96.063,92.146 96.129,92.146 96.75,91.525 U3.24
  Top Layer w0.3: 95.636,93 95.636,96.518 96.518,97.4 U3.36
  Bottom Layer w0.5: pad.2 94.853,93.647
  other v1: 95,93
+5: IC1.2 IC4.8 J2.1 pad.+5 R15.1 R18.1 R19.2 R20.2 R21.2 R22.2 R23.2 | length 135.1
  Top Layer w0.381: R20.2 R19.2 103.527,67.427 R22.2 107.427,67.427 R21.2 108.909,67.5 109.259,67.15 ; R23.2 114.506,67.15 v1(116,67.15)
  Top Layer w0.5: pad.+5@94.5,121.15 94.5,122.682 114.313,122.682 117.64,119.355 122.555,119.355 123.1,118.81 J2.1 ; IC1.2 95.365,109.537 ; v1(95.365,111.015) 95.365,109.537 ; R20.2 100.773,67.4 100.305,67.869 100.305,75.705 102.095,77.495 IC4.8 102.095,80.019 104.726,82.65 ; R18.1 104.726,82.65 ; R15.1 105.3,107.544 ; pad.+5@107,83.15 105.226,83.15 104.726,82.65 ; v1(109.017,103.827) 105.3,107.544 ; 95.365,109.537 102.989,109.855 105.3,107.544
  Bottom Layer w0.381: 109.259,67.15 v1(116,67.15)
  Bottom Layer w0.5: pad.+5@94.5,121.15 99,116.65 99,114.65 v1(95.365,111.015) ; pad.+5@107,83.15 109.017,85.167 v1(109.017,103.827)
+12-24V: C7.1 pad.12-24V U1.1 | length 21.2
  Top Layer w0.5: pad.12-24V 38,111.65 39.22,110.43 ; U1.1 39.22,110.43 ; C7.1 42.75,106.9 39.22,110.43
Enable: IC3.7 U3.20 | length 5.9
  Top Layer w0.5: IC3.7 93.865,87.132 94.75,88.017 U3.20
GND: C3.2 C4.2 C5.2 C7.2 C8.1 C9.1 C10.1 C18.2 D2.2 IC3.2 IC3.3 IC3.4 IC4.5 J2.4 J2.5 pad.GND R2.2 R3.1 R17.3 R25.1 U1.3 U2.1 U3.8 U3.23 U3.35 U3.47 | length 365.8
  Top Layer w0.3: U3.8 90.875,93.9 92,95.025 92,96 92.5,96.5 92.5,97 91.75,97.75 91.75,97.97 U3.47
  Top Layer w0.381: J2.5 J2.4
  Top Layer w0.5: U1.3 41.5,119.65 pad.GND@50.5,119.65 ; pad.GND@54,104.65 69.851,104.65 ; C3.2 54.25,107.95 54.575,107.625 R3.1 72,106.799 ; 64.5,81 64.5,99.299 69.851,104.65 ; 67.5,84.15 D2.2@67.5,82.906 ; U2.1 75.22,109.372 77,107.592 C4.2 ; v1(84.277,106.731) 83.414,105.867 83.414,94.375 83.439,94.35 C10.1 ; pad.GND@101.5,116 103.475,114.025 R2.2 ; R17.3 R17.3@103.8,86.65 ; IC4.5 114.93,78.362 117.702,75.59 ; C9.1 110,107.29 109.708,106.998 ; R25.1 117.702,64.843 117.702,75.59 ; C8.1 117,107.775 116.223,106.998 109.708,106.998 ; v1(118.942,116) 120.5,117.558 J2.5 ; D2.2@67.5,82.906 69,82.906 69,82.9 67.5,82.9 D2.2@67.5,82.906 ; 69.851,104.65 72,106.799 ; 72,106.799 72,106.751 73.601,105.15 C4.2 ; C4.2 77,88.379 82.029,83.35 C18.2 92.659,83.35 93.865,82.144 IC3.2 IC3.3 IC3.4 96.405,78.435 96.989,77.851 99.187,77.851 100.178,78.842 100.178,87.046 100.787,87.655 102.347,87.655 103.353,86.65 R17.3@103.8,86.65 ; R17.3@103.8,86.65 107,86.65 109.017,84.633 117.702,75.59 ; R2.2 105.794,113.64 107.01,112.425 ; R2.2 105.964,114.025 107.01,112.979 107.01,112.425 ; 107.01,112.425 107.223,112.212 107.223,107.315 107.541,106.998 109.708,106.998 ; 107.01,112.425 107.01,107.29 107.417,106.883 109.594,106.883 109.708,106.998
  Top Layer w0.7: C7.2 50.35,101 pad.GND@54,104.65
  Bottom Layer w0.5: pad.GND@50.5,119.65 54.25,115.9 C3.2 ; C4.2 77,106.096 84.804,113.9 C5.2@86.487,113.9 ; v1(84.277,106.731) 100.965,106.731 101.5,107.266 101.5,108.991 ; C5.2 C5.2@86.487,113.9 ; v1(118.942,116) pad.GND@101.5,116 ; C5.2@86.487,113.9 86.487,110.287 87.782,108.991 101.5,108.991 ; 101.5,108.991 pad.GND@101.5,116 ; 101.5,108.991 104.038,108.991 104.648,109.601 104.648,112.852 pad.GND@101.5,116
NetC3_1: C3.1 C4.1 D1.1 R3.2 U1.2 U2.2 | length 63.8
  Top Layer w0.5: C3.1 45.305,111.65 43.78,113.175 U1.2 44.74,114.96 62.74,114.96 63.75,113.95 62.992,113.95 D1.1@62.25,113.95 ; R3.2 72,112.284 74.143,114.427 79.375,114.427 79.78,114.022 U2.2 79.78,110.313 ; C4.1 79,107.954
  Top Layer w0.7: D1.1@63.75,113.95 67.325,113.95 71.9,109.375 R3.2 ; 79,107.954 79.78,108.734 79.78,110.313
NetC8_2: C8.2 R4.1 | length 2.6
  Top Layer w0.251: R4.1 115.25,108.3 C8.2
NetC9_2: C9.2 R5.1 | length 2.6
  Top Layer w0.251: R5.1 108.25,108.3 C9.2
NetC10_2: C10.2 U3.5 | length 5.7
  Top Layer w0.3: C10.2 85.263,95.95 85.813,96.5 87.5,96.5 88.552,95.448 89.404,95.448 U3.5@89.5,95.352
NetC11_2: 
NetD2_1: D2.1 U3.38 | length 42.7
  Top Layer w0.2: 96,102.225 96.25,101.975 U3.38
  Top Layer w0.5: D2.1@67.5,86 68.25,86 69,86 v1(69,92.894)
  Bottom Layer w0.3: 78.332,102.225 96,102.225
  Bottom Layer w0.5: v1(69,92.894) 78.332,102.225
NetIC5_1: 
NetIC5_2: 
NetIC5_3: 
NetIC5_4: 
NetIC7_5: 
NetIC7_6: 
NetIC7_7: 
NetIC7_8: 
NetJ1_1: IC1.6 J1.1 R1.2 R5.2 | length 28
  Top Layer w0.251: IC1.6 96.635,115.285 100,118.65 112.27,118.65 J1.1 R1.2
  Top Layer w0.5: R5.2 110,111.15 R1.2
NetJ1_2: IC1.7 J1.2 R1.1 R4.2 | length 34.4
  Top Layer w0.251: J1.2 112.875,121.42 114.25,120.045 R1.1
  Top Layer w0.5: IC1.7 95.365,116.015 100.77,121.42 J1.2 ; R1.1 114.25,113.55 117,110.8 R4.2
NetJ2_2: J2.2 R11.1 | length 31.9
  Top Layer w0.381: R11.1 105.3,93.2 122.45,110.35 J2.2
NetJ2_3: J2.3 R14.1 | length 30.2
  Top Layer w0.5: R14.1 106.054,95.054 121.8,110.8 J2.3
NetJ3_1: IC4.6 J3.1 R23.1 R24.2 | length 26.3
  Top Layer w0.381: R24.2 R23.1
  Top Layer w0.5: IC4.6 104.635,77.365 107.85,74.15 J3.1 112.96,75.495 113.386,75.921 116.154,75.921 116.891,75.184 116.891,72.459 114.256,69.825 R23.1
NetJ3_2: IC4.7 J3.2 R24.1 R25.2 | length 28
  Top Layer w0.381: R24.1 112.368,66.532 R25.2
  Top Layer w0.5: IC4.7 103.365,77.737 107.587,73.515 ; R24.1 111.9,66.9 110.5,68.3 110.5,70.602 107.587,73.515 ; J3.2 115.5,72.373 110.5,72.203 110.5,72.65 109.635,73.515 107.587,73.515
NetR2_1: IC1.8 R2.1 | length 12.4
  Top Layer w0.5: IC1.8 94.095,112.422 94.242,112.275 R2.1
NetR17_1: R17.1 R18.2 | length 3.8
  Top Layer w0.381: R17.1 101.5,82.9 R18.2
NetR17_2: R17.2 U3.11 | length 26.1
  Top Layer w0.2: v1(86.5,95) 86.5,94.659 86,94.159 86,92.4 U3.11 ; v1(99.469,88) 99.5,88 101.1,89.6 R17.2
  Bottom Layer w0.2: v1(86.5,95) 90.5,95 97.5,88 v1(99.469,88)
NetR19_1: IC4.2 IC4.3 R19.1 R22.1 U3.13 | length 32.1
  Top Layer w0.2: U3.13 91.258,90.418 91.258,87.51 91.618,87.15 v1(92.215,87.15)
  Top Layer w0.381: R19.1 103.365,69.285 IC4.2 IC4.3 104.635,71.365 105.54,70.46 R22.1
  Top Layer w0.5: IC4.2 v1(103.365,76)
  Bottom Layer w0.5: v1(92.215,87.15) v1(103.365,76)
NetR20_1: IC4.1 R20.1 U3.31 | length 32.8
  Top Layer w0.25: 98.661,79 98.661,84.339 97.5,85.5 97.5,88.377 98,88.877 98,89.65 v1(98.661,90.311)
  Top Layer w0.381: R20.1 101.5,71.905 102.095,72.5 IC4.1
  Top Layer w0.5: U3.31 98.233,94.892 99.758,94.892 101,93.65 v1(102,93.65) ; 102.048,75.103 102.048,72.985 IC4.1
  Bottom Layer w0.5: 98.661,79 99.547,78.114 99.547,77.603 102.048,75.103 ; v1(98.661,90.311) v1(102,93.65)
NetR21_1: IC4.4 R21.1 U3.30 | length 29.9
  Top Layer w0.5: U3.30 98.25,94.375 99.017,94.375 100.657,92.735 101.415,92.735 v1(102.5,91.65) ; v1(105,74.65) 105.905,73.745 IC4.4 105.905,72.5 107.5,70.906 R21.1
  Bottom Layer w0.5: v1(102.5,91.65) 105,89.15 v1(105,74.65)
NetU3_7: U3.7 U3.10 | length 4.9
  Top Layer w0.3: U3.10 88.234,92.9 88.014,93.12 88.014,93.561 88,93.575 88,94.4 U3.7
NetU3_45: IC1.4 U3.45 | length 12.6
  Top Layer w0.3: U3.45 92.75,104.4 95.416,107.066 96.942,107.066 97.905,108.029 IC1.4
NetU3_46: IC1.1 U3.46 | length 10.3
  Top Layer w0.152: U3.46 92.275,98.899 92.275,99.709 92.276,99.71 92.276,105.206 94.095,107.025 IC1.1
PA11: R11.2 U3.32 | length 6.7
  Top Layer w0.152: 100.46,95.4 100.86,95 102.15,95 103.651,93.499 103.701,93.499 104,93.2 R11.2
  Top Layer w0.2: U3.32 100.46,95.4
PA12: R14.2 R15.2 U3.33 | length 7.8
  Top Layer w0.381: R14.2@104,95.104 104,95.908
  Top Layer w0.5: U3.33 98.233,95.908 104,95.908 R15.2 ; R14.2 R14.2@104,95.104
PB10: IC3.6 U3.21 | length 5.6
  Top Layer w0.152: IC3.6 95.135,87.609 95.243,87.716 95.243,90.417 U3.21
PB11: IC3.5 U3.22 | length 5.8
  Top Layer w0.251: U3.22 95.758,90.417 95.758,87.986 96.405,87.339 IC3.5
pads on no net: D1.2 IC1.3 IC1.5 IC3.1 J2.S U3.2 U3.3 U3.4 U3.6 U3.12 U3.14 U3.15 U3.16 U3.17 U3.18 U3.19 U3.25 U3.26 U3.27 U3.28 U3.29 U3.34 U3.37 U3.39 U3.40 U3.41 U3.42 U3.43 U3.44
copper on no net: | length 313.7
  Top Layer w0.254: 25.5,110 25.5,127 130,127 130,60 75.5,60 25.5,110

## Polygon pours and split planes (outlines as drawn)
GND on Top Layer (solid, pour order 10): 130,127 129.5,126.5 129.5,60 76,60 25.5,110.5 25.5,127
no net on Top Layer (solid, pour order 0): 129,126.5
+3.3V on Bottom Layer (solid, pour order 12): 129.5,127 129.5,60.5 75,60.5 26,109.5 26,127

## Text inside footprints (layer, text, board x,y; h text height)
C3: Top Overlay "+" at 53.05,110.475 h2 r180
C4: Top Overlay "+" at 78.7,106.4 h2
C5: Top Overlay "+" at 85.25,116.1 h2 r90
C7: Top Overlay "+" at 43.05,99.6 h2 r180